# Altium PCB board.PcbDoc
Units mm, origin at the board's own origin, x right, y up, seen from the top; angles counter-clockwise.
Board outline 62 x 44 mm, 2 copper layers (Top Layer, Bottom Layer); 51 components, 62 nets, 217 pads, 78 vias.
Unrouted connection lines stored in the file: 17.
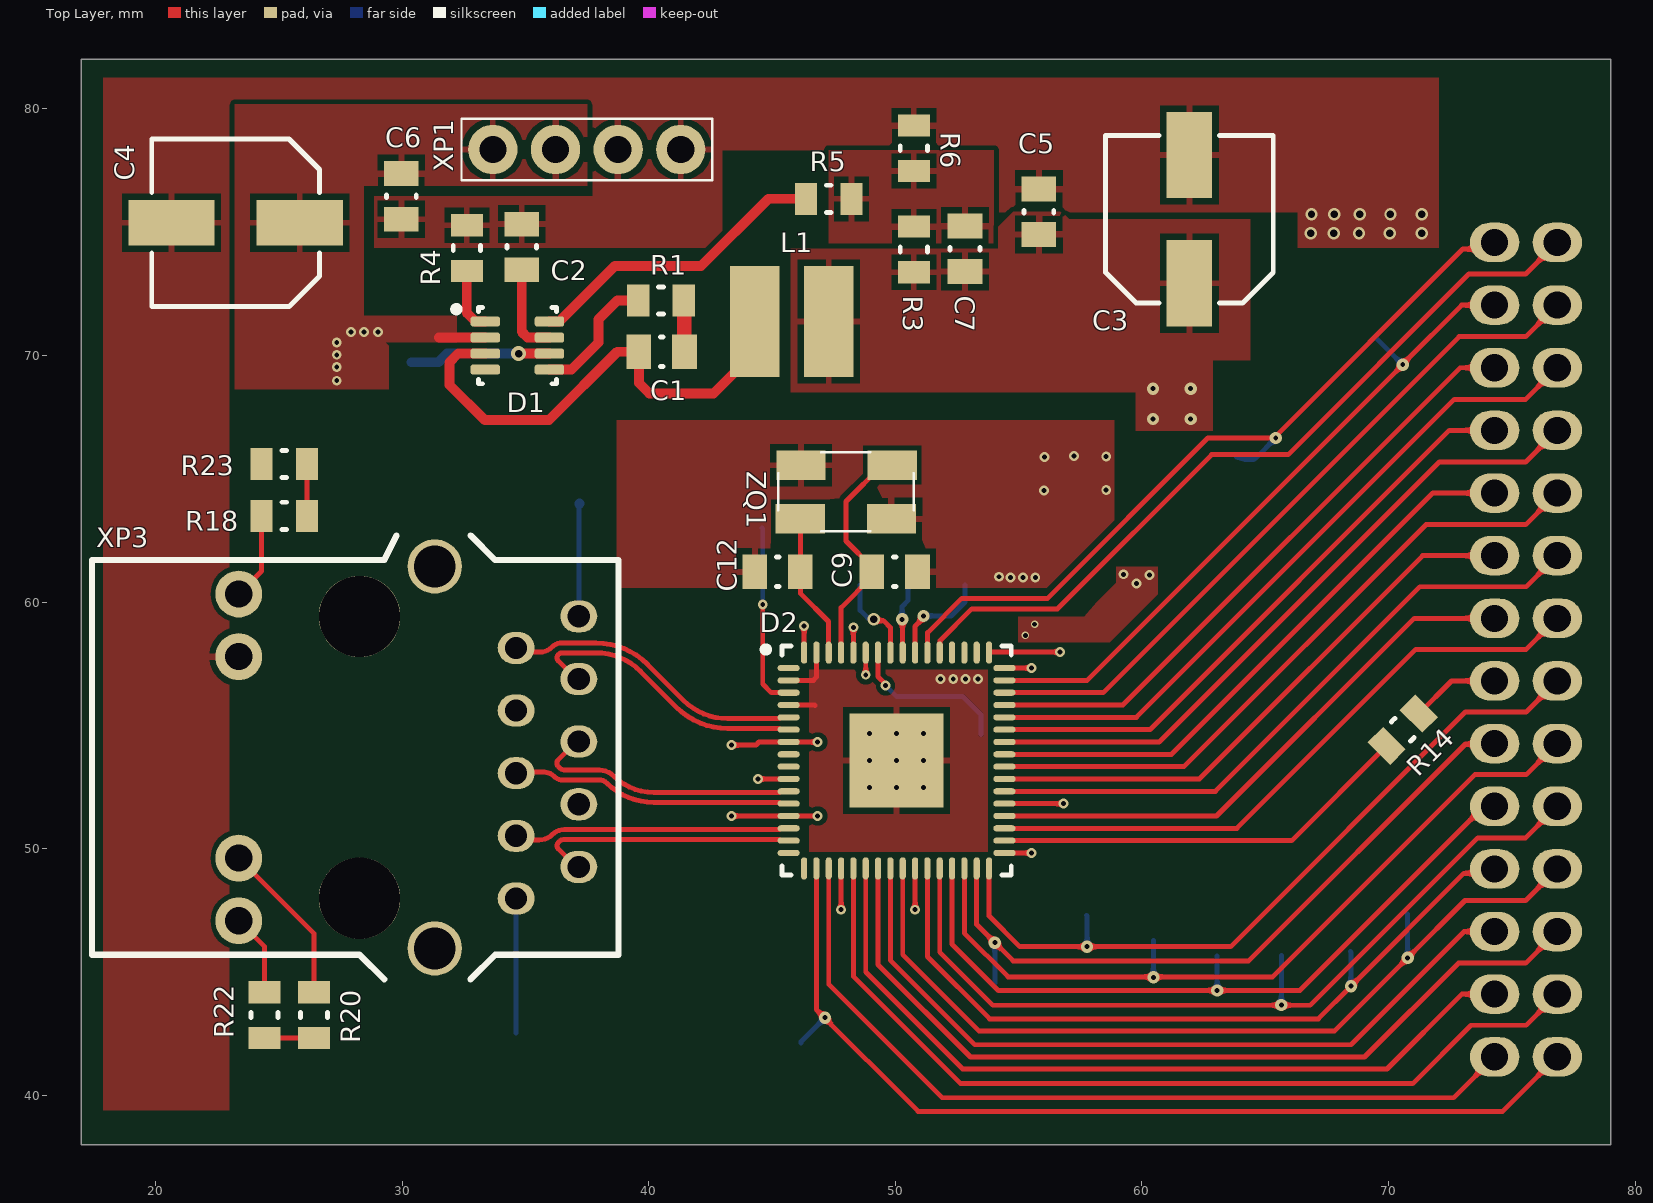
[diagram p0: Top Layer view]
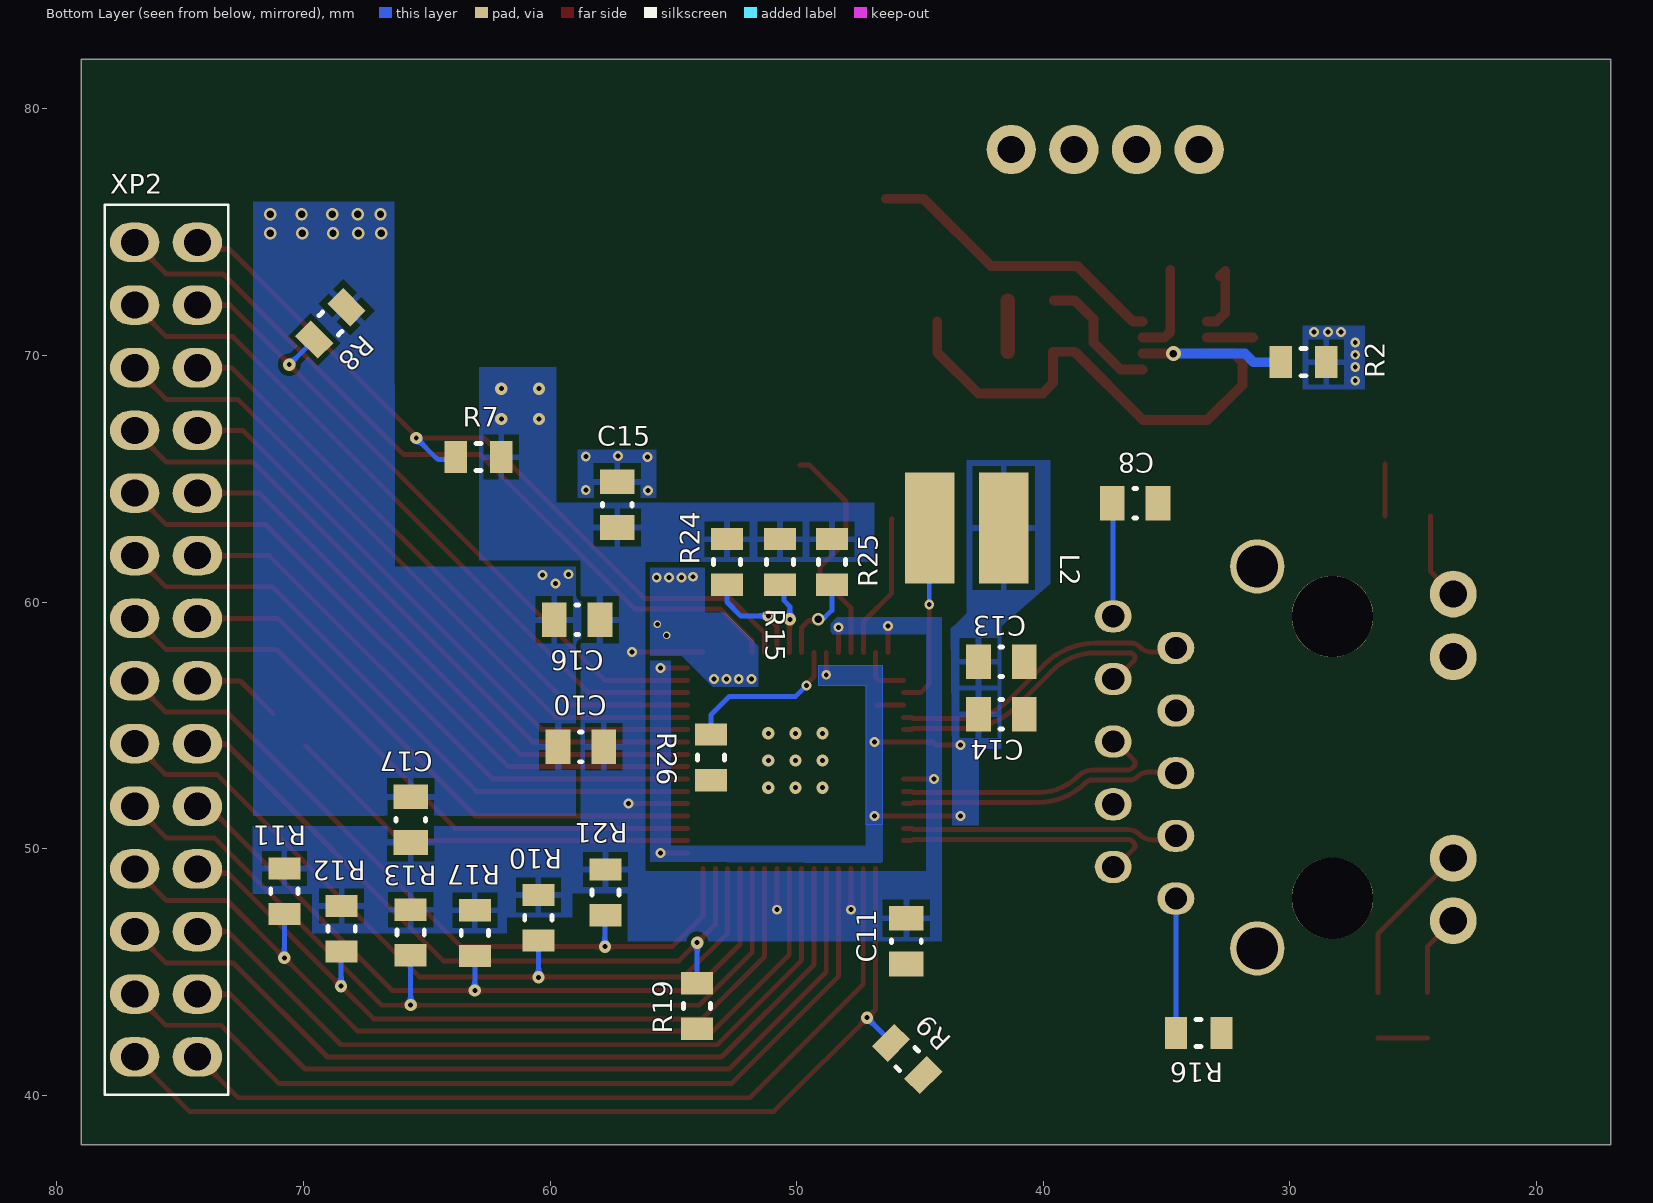
[diagram p1: Bottom Layer view, seen from below]
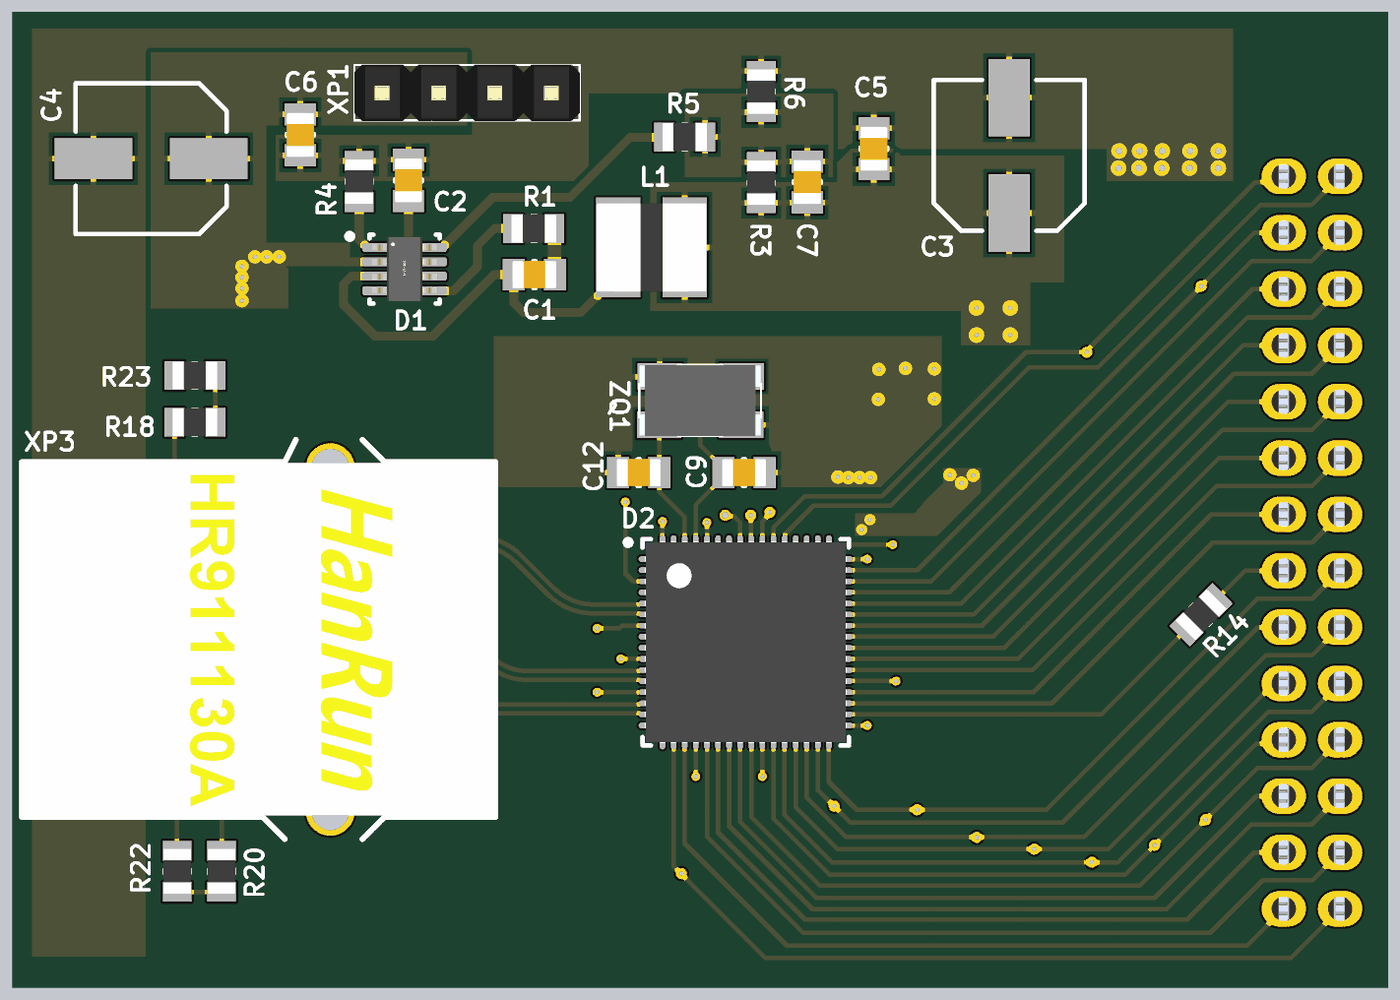
[diagram p2: 3D render of the assembled board from above, using the file's embedded part models]
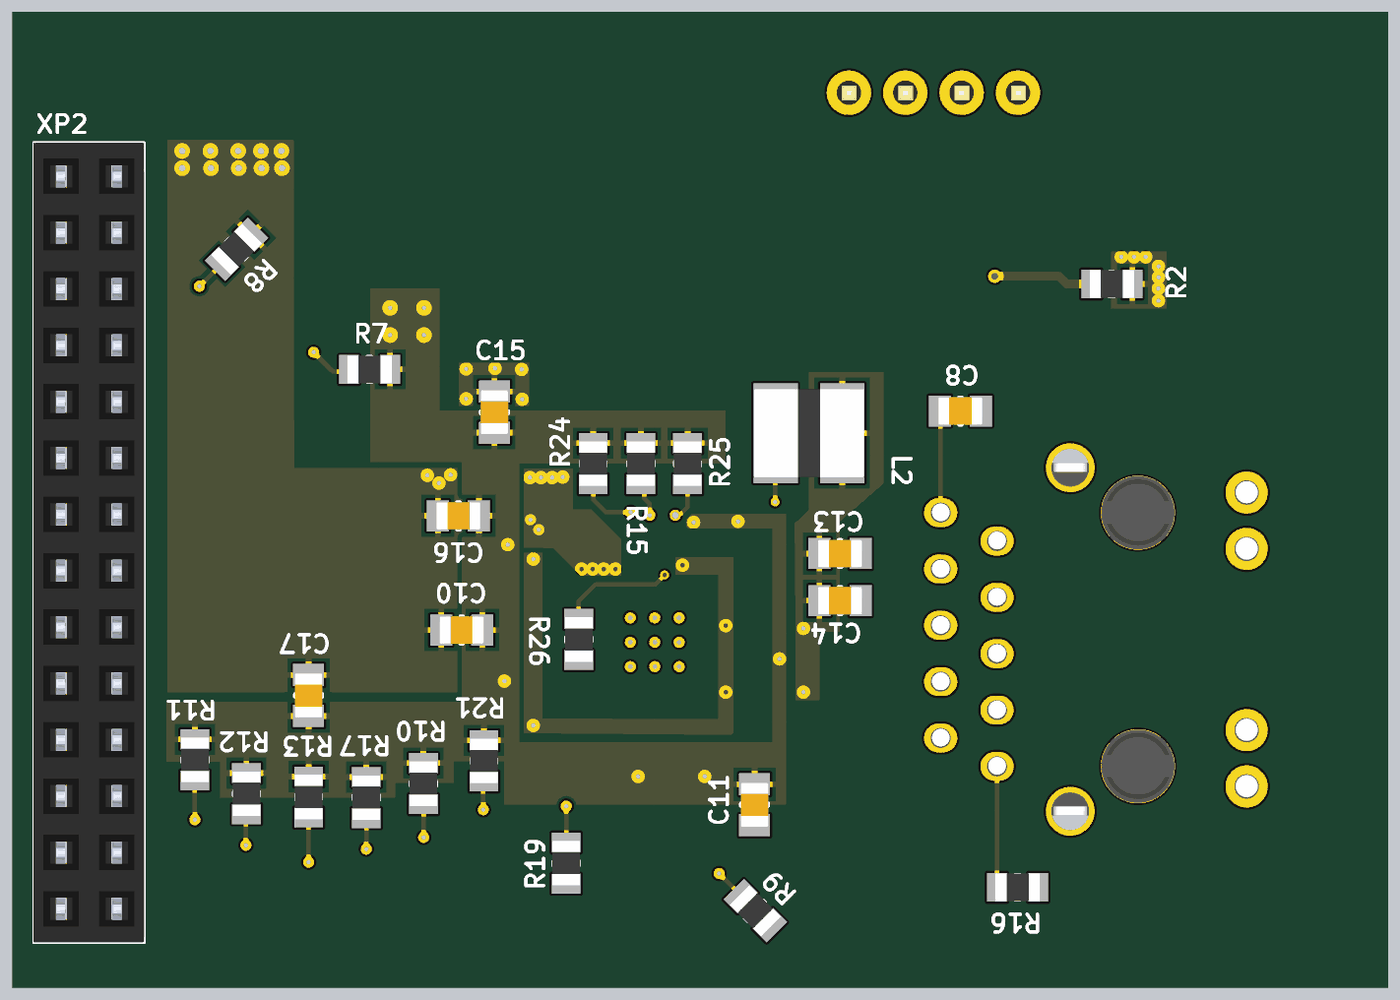
[diagram p3: 3D render of the assembled board from below, using the file's embedded part models]

## Layer stack, top to bottom
Top Solder: solder mask 0.0102, Solder Resist, Dk 3.5
Top Layer: signal copper 0.0356
Dielectric 1: dielectric 0.32, FR-4, Dk 4.8
Bottom Layer: signal copper 0.0356
Bottom Solder: solder mask 0.0102, Solder Resist, Dk 3.5

## Board outline
17,38 79,38 79,82 17,82

## Design rules (kind name [scope] priority, off if disabled: settings)
Clearance [All] p1: gap=0.2 ignorepadtopadclearanceinfootprint=TRUE
DiffPairsRouting [All] p1: maxlimit=0.2 minlimit=0.2 mostfreqgap=0.2 toplayer_minwidth=0.2 toplayer_maxwidth=0.2 toplayer_prefwidth=0.2 bottomlayer_minwidth=0.2 bottomlayer_maxwidth=0.2 bottomlayer_prefwidth=0.2 maxuncoupledlength=12.7
PolygonConnect [All] p1: thpad.connectstyle=Relief thpad.reliefconductorwidth=0.254 thpad.reliefentries=4 thpad.polygonreliefangle="90 Angle" thpad.airgapwidth=0.254 smdpad.connectstyle=Relief smdpad.reliefconductorwidth=0.254 smdpad.reliefentries=4 smdpad.polygonreliefangle="90 Angle" smdpad.airgapwidth=0.254 via.connectstyle=Direct via.reliefconductorwidth=0.254 via.reliefentries=4 via.polygonreliefangle="90 Angle" via.airgapwidth=0.254
RoutingCorners [All] p1: cornerstyle=Round minsetback=2.54 maxsetback=2.54
RoutingVias [All] p1: holewidth=0.5 width=1.1 viastyle="Through Hole" minholewidth=0.2 minwidth=0.3 maxholewidth=6.3 maxwidth=4
SolderMaskExpansion [All] p1: expansion=0.102 istentingtop=FALSE
Width [All] p1: maxlimit=5 minlimit=0.2 preferedwidth=0.2
28 further rules are at their usual default settings.

## Classes and differential pairs
component class power: C1 C2 C3 C4 C5 C6 C7 D1 L1 R1 R2 R3 R4 R5 R6 XP1
component class ethernet: C8 C9 C10 C11 C12 C13 C14 C15 C16 C17 D2 L2 R7 R8 R9 R10 R11 R12 R13 R14 R15 R16 R17 R18 R19 R20 R21 R22 R23 R24 R25 R26 XP2 XP3 ZQ1
differential pair MDI3: +MDI3_P -MDI3_N
differential pair MDI2: +MDI2_P -MDI2_N
differential pair MDI1: +MDI1_P -MDI1_N
differential pair MDI0: +MDI0_P -MDI0_N

## Components (designator, comment, footprint, x,y, rotation, side; value= is the part's Value field where it differs from the comment)
C1 "100nF" "SMD 0805" 40.525,70.15 r180 top
C2 "100nF" "SMD 0805" 34.85,74.4 r270 top
C3 "47uF" "SMD47 ECAP" 61.925,75.525 r90 top
C4 "47uF" "SMD47 ECAP" 23.25,75.375 r180 top
C5 "100nF" "SMD 0805" 55.825,75.825 r270 top
C6 "100nF" "SMD 0805" 29.975,76.45 r270 top
C7 "22pF" "SMD 0805" 52.825,74.325 r270 top
C8 "100nF" "SMD 0805" 36.275,64 r0 bottom
C9 "22pF" "SMD 0805" 49.975,61.225 r0 top
C10 "4.7uF" "SMD 0805" 58.75,54.125 r180 bottom
C11 "100nF" "SMD 0805" 45.55,46.25 r90 bottom
C12 "22pF" "SMD 0805" 45.225,61.225 r180 top
C13 "100nF" "SMD 0805" 41.7,55.45 r0 bottom
C14 "4.7uF" "SMD 0805" 41.7,57.575 r0 bottom
C15 "100nF" "SMD 0805" 57.275,63.95 r270 bottom
C16 "100nF" "SMD 0805" 58.9,59.275 r180 bottom
C17 "100nF" "SMD 0805" 65.652,51.177 r270 bottom
D1 "MP2315" PWR_MP2315 34.675,70.4 r270 top
D2 "RTL8211EG" QFN50P900X900X100_HS-65N 50.05,53.575 r0 top locked
L1 "4.7uH" SP43-4R7M 45.8,71.375 r180 top
L2 "4.7uH" SP43-4R7M 43.1,63 r0 bottom
R1 "20R" RESC0805 40.5,72.225 r180 top
R2 "100K" RESC0805 29.45,69.725 r180 bottom
R3 "100K" RESC0805 50.75,74.3 r270 top
R4 "75K" RESC0805 32.625,74.35 r90 top
R5 "33K" RESC0805 47.3,76.35 r180 top
R6 "33K" RESC0805 50.75,78.4 r270 top
R7 "1.5K" RESC0805 62.9,65.875 r0 bottom
R8 "4.7K" RESC0805 68.904,71.296 r315 bottom
R9 "4.7K" RESC0805 45.521,41.471 r45 bottom
R10 "1.5K" RESC0805 60.475,47.2 r270 bottom
R11 "4.7K" RESC0805 70.775,48.275 r270 bottom
R12 "4.7K" RESC0805 68.45,46.75 r270 bottom
R13 "4.7K" RESC0805 65.65,46.6 r270 bottom
R14 "20R" RESC0805 70.571,54.821 r225 top
R15 "4.7K" RESC0805 50.675,61.625 r270 bottom
R16 "0K" RESC0805 33.7,42.525 r0 bottom
R17 "4.7K" RESC0805 63.05,46.575 r270 bottom
R18 "560R" RESC0805 25.225,63.496 r180 top
R19 "4.7K" RESC0805 54.044,43.619 r90 bottom
R20 "560R" RESC0805 26.425,43.25 r90 top
R21 "1.5K" RESC0805 57.75,48.225 r270 bottom
R22 "4.7K" RESC0805 24.425,43.25 r270 top
R23 "4.7K" RESC0805 25.225,65.6 r0 top
R24 "4.7K" RESC0805 52.825,61.625 r270 bottom
R25 "4.7K" RESC0805 48.571,61.625 r270 bottom
R26 "2.49K" RESC0805 53.475,53.7 r90 bottom
XP1 "PLS-4" PLS-4 37.49,78.35 r0 top
XP2 "PLS-40" PBD-28 74.3,74.58 r270 bottom
XP3 "HR911130A" HR911130A 28.275,53.7 r90 top locked
ZQ1 "YSX531SL" YSX531SL 47.994,64.476 r0 top

## Footprints (in the part's own frame and the unit in brackets; to place one, negate y for a bottom-side part, rotate by r counter-clockwise, add the part's x,y. Pads: shape width x height; smd on the part's side, far side on the other; paste and mask are expansions set on the pad)
HR911130A [mm]
  oval 1.3x1.5 hole 0.9: 1(5.72,-8.89) 2(4.44,-6.35) 3(3.18,-8.89) 4(1.9,-6.35) 5(0.64,-8.89) 6(-0.64,-6.35) 7(-1.9,-8.89) 8(-3.18,-6.35) 9(-4.44,-8.89) 10(-5.72,-6.35)
  round 1.9 hole 1.1: 11(6.625,4.9) 12(4.085,4.9) 13(-4.085,4.9) 14(-6.625,4.9)
  round 2.2 hole 1.7: 15(-7.745,-3.05) 16(7.745,-3.05)
  round 3.3 hole 3.3: ""(-5.715,0) ""(5.715,0)
  silkscreen extent -9,-10.5 9,10.85, body extent -7.93,-10.48 7.96,10.92, height 14
PBD-28 [mm]
  oval 1.6x2 hole 1.1: 1(0,0) 2(0,-2.54) 3(2.54,0) 4(2.54,-2.54) 5(5.08,0) 6(5.08,-2.54) 7(7.62,0) 8(7.62,-2.54) 9(10.16,0) 10(10.16,-2.54) 11(12.7,0) 12(12.7,-2.54) 13(15.24,0) 14(15.24,-2.54) 15(17.78,0) 16(17.78,-2.54) 17(20.32,0) 18(20.32,-2.54) 19(22.86,0) 20(22.86,-2.54) 21(25.4,0) 22(25.4,-2.54) 23(27.94,0) 24(27.94,-2.54) 25(30.48,0) 26(30.48,-2.54) 27(33.02,0) 28(33.02,-2.54)
  silkscreen extent -1.53,-3.75 34.55,1.25, body extent -1.52,-3.75 34.54,1.25, height 8.5
PLS-4 [mm] "Pins 1x4"
  round 2 hole 1.1: 1(-3.81,0) 2(-1.27,0) 3(1.27,0) 4(3.81,0)
  silkscreen extent -5.08,-1.25 5.08,1.25, body extent -5.08,-1.27 5.08,1.27, height 9.2
PWR_MP2315 [mm]
  rrect50% 0.4x1.2 smd: 1(-0.975,-1.3) 2(-0.325,-1.3) 3(0.325,-1.3) 4(0.975,-1.3) 5(0.975,1.3) 6(0.325,1.3) 7(-0.325,1.3) 8(-0.975,1.3)
  silkscreen extent -1.6,-2.6 1.55,1.58, body extent -1.45,-1.48 1.45,1.48, height 1.1
QFN50P900X900X100_HS-65N [mm] "QFN, 64-Leads, Body 9,00x9,00mm, Pitch 0,50mm, Thermal Pad 3,80x3,80mm, IPC Medium Density"
  oval 0.9x0.25 smd: 1(-4.375,3.75) 2(-4.375,3.25) 3(-4.375,2.75) 4(-4.375,2.25) 5(-4.375,1.75) 6(-4.375,1.25) 7(-4.375,0.75) 8(-4.375,0.25) 9(-4.375,-0.25) 10(-4.375,-0.75) 11(-4.375,-1.25) 12(-4.375,-1.75) 13(-4.375,-2.25) 14(-4.375,-2.75) 15(-4.375,-3.25) 16(-4.375,-3.75) 33(4.375,-3.75) 34(4.375,-3.25) 35(4.375,-2.75) 36(4.375,-2.25) 37(4.375,-1.75) 38(4.375,-1.25) 39(4.375,-0.75) 40(4.375,-0.25) 41(4.375,0.25) 42(4.375,0.75) 43(4.375,1.25) 44(4.375,1.75) 45(4.375,2.25) 46(4.375,2.75) 47(4.375,3.25) 48(4.375,3.75)
  oval 0.25x0.9 smd: 17(-3.75,-4.375) 18(-3.25,-4.375) 19(-2.75,-4.375) 20(-2.25,-4.375) 21(-1.75,-4.375) 22(-1.25,-4.375) 23(-0.75,-4.375) 24(-0.25,-4.375) 25(0.25,-4.375) 26(0.75,-4.375) 27(1.25,-4.375) 28(1.75,-4.375) 29(2.25,-4.375) 30(2.75,-4.375) 31(3.25,-4.375) 32(3.75,-4.375) 49(3.75,4.375) 50(3.25,4.375) 51(2.75,4.375) 52(2.25,4.375) 53(1.75,4.375) 54(1.25,4.375) 55(0.75,4.375) 56(0.25,4.375) 57(-0.25,4.375) 58(-0.75,4.375) 59(-1.25,4.375) 60(-1.75,4.375) 61(-2.25,4.375) 62(-2.75,4.375) 63(-3.25,4.375) 64(-3.75,4.375)
  rect 3.8x3.8 smd: 65(0,0)
  silkscreen extent -5.42,-4.65 4.65,4.65, body extent -4.55,-4.55 4.55,4.55, height 1
RESC0805 [mm] "Chip Resistor, 2-Leads, Body 2,00x1,25mm, IPC Medium Density"
  rect 0.9x1.3 smd: 1(-0.925,0) 2(0.925,0)
  silkscreen extent -0.1,-0.55 0.1,0.55, body extent -1,-0.63 1,0.63, height 1.4
"SMD47 ECAP" [mm] "47µF 10V ±20% SMD Electrolytic Capacitor, 105°C, O6.3?5.4mm (JB)"
  rect 3.5x1.85 smd: 1(-2.6,0) 2(2.6,0)
  silkscreen extent -3.4,-3.4 3.4,3.4, body extent -3.4,-3.4 3.4,3.4, height 5.9
"SMD 0805" [mm] "Chip Capacitor, 2-Leads, Body 2,00x1,25mm, IPC Medium Density"
  rect 1x1.4 smd: 1(-0.925,0) 2(0.925,0)
  silkscreen extent -0.05,-0.6 0.05,0.6, body extent -1,-0.63 1,0.63, height 1.4
SP43-4R7M [mm] "Chip Inductor, 2-Leads, Body 4,50x4,00mm, IPC Medium Density"
  rect 2x4.5 smd: 1(-1.5,0) 2(1.5,0)
  body extent -2.5,-2 2.5,2, height 3.2
YSX531SL [mm]
  rect 2x1.2 smd: 1(-1.85,-1.1) 2(1.85,-1.1) 3(1.881,1.074) 4(-1.819,1.074)
  silkscreen extent -2.75,-1.6 2.75,1.6, body extent -2.73,-1.6 2.73,1.6, height 1.15

## Part data
C1 C2 C5 C6 C8 C11 C13 C15 C16 C17: "Конденсатор номиналом 1.5 nF"
C3 C4: "Электролитический конденсатор номиналом 47uF"
C7 C9 C12: "Конденсатор номиналом 22 pF"
C10 C14: "Конденсатор номиналом 4.7 uF"
D1: "Микросхема понижающего преобразователя напряжения со встроенным синхронным выпрямителем на МОП-транзисторах."
L1 L2: library part 4.7u, "Катушка индуктивности 4.7 мкГн"
R1 R14: "Резистор номиналом 20 Ом"
R2 R3: "Резистор номиналом 100 кОм"
R4: "Резистор номиналом 75 кОм"
R5 R6: "Резистор номиналом 33 кОм"
R7 R10 R21: "Резистор номиналом 1.5 кОм"
R8 R9 R11 R12 R13 R15 R17 R19 R22 R23 R24 R25: "Резистор номиналом 4.7 кОм"
R16: "Резистор номиналом 0 Ом"
R18 R20: "Резистор номиналом 560 Ом"
R26: "Резистор номиналом 2.49 кОм"
XP1: library part SMT_POWER, "SMT-разъём для связи платы ПП с периферийными устройствами"
XP2: library part SMT_FPGA, "Служит для подключения разрабатываемой платы"
XP3: library part RJ-45, "Разъём RJ45 с встроенными трансформаторами и индикацией, 10/100Base-T Ethernet (HR911130A)"
ZQ1: "Кварцевый резонатор"

## Via types
v1: diameter 0.4, hole 0.2, Top Layer to Bottom Layer, 39 vias
v2: diameter 0.5, hole 0.2, Top Layer to Bottom Layer, 25 vias
v3: diameter 0.5, hole 0.3, Top Layer to Bottom Layer, 11 vias
v4: diameter 0.3, hole 0.2, Top Layer to Bottom Layer, 2 vias
v5: diameter 0.6, hole 0.3, Top Layer to Bottom Layer, 1 vias

## Nets (pads, with @x,y where several pads share a name; then routed paths per layer and width w, separated by ;. In a path a pad name is that pad's centre, name@x,y a point inside that pad or via, vN(x,y) a via of type N, cw(c..) or ccw(c..) an arc to the next point about the centre after c; other vN are vias at no path point)
+3V3: C3.1 C5.2 C7.2 C10.2 C11.2 C15.2 C16.2 C17.2 D2.10 D2.20 D2.26 D2.37 D2.49 D2.60 D2.64 L1.1 R3.2 R7.1 R10.1 R11.1 R12.1 R13.1 R15.1 R17.1 R21.1 R22.1 R24.1 R25.1 XP3.14 | length 15.3
  Top Layer w0.2: XP3.14 24.425,46.025 R22.1 ; v1(44.425,52.825) D2.10 ; D2.64 v1(46.3,59.025) ; v1(47.8,47.525) D2.20 ; D2.60 v1(48.3,58.975) ; v1(50.8,47.525) D2.26 ; D2.49 53.8,57.952 53.823,57.975 v1(56.675,57.975) ; D2.37 v1(56.825,51.825)
  other v2: 60.45,67.425 61.975,67.425 60.45,68.65 61.975,68.65
CKXTAL1: C9.1 D2.61 ZQ1.3 | length 9.6
  Top Layer w0.2: D2.61 47.8,59.775 49.05,61.025 C9.1 49.05,61.425 48,62.475 48,64.075 49.475,65.55 ZQ1.3
CKXTAL2: C12.1 D2.62 ZQ1.1 | length 5.9
  Top Layer w0.2: ZQ1.1 46.15,63.37 C12.1 46.158,61.217 46.158,60.342 47.29,59.21 47.29,57.96 D2.62
COL: D2.31 R19.2 XP2.17 | length 29.2
  Top Layer w0.2: D2.31 53.3,46.925 54.775,45.45 64.325,45.45 73.117,54.242 74.282,54.242 XP2.17
  Bottom Layer w0.2: v2(54.038,46.188) 54.038,44.551 R19.2
CRS: D2.32 R21.2 XP2.16 | length 31.2
  Top Layer w0.2: D2.32 53.8,47.275 55.05,46.025 v2(57.775,46.025) 63.6,46.025 73.115,55.54 75.58,55.54 XP2.16
  Bottom Layer w0.2: R21.2 57.775,47.275 v2(57.775,46.025)
GND: C2.1 C3.2 C4.2 C5.1 C6.2 C8.1 C9.2 C10.1 C11.1 C12.2 C13.1 C14.1 C15.1 C16.1 C17.1 D1.4 D2.2 D2.4 D2.63 D2.65 R4.2 R6.1 R8.1 R9.1 R16.1 R19.1 R23.1 R26.1 XP1.3 XP1.4 XP3.12 XP3.15 XP3.16 ZQ1.2 ZQ1.4 | length 3.3
  Top Layer w0.2: D2.4 46.725,55.825 46.75,55.8 ; D2.2 46.675,56.825 46.8,56.95 D2.63
  other v1: 51.825,56.875 52.35,56.875 52.85,56.875 53.35,56.875 59.775,60.75 54.675,61 55.175,61 55.675,61 54.2,61.025 59.25,61.125 60.3,61.1 56.025,64.525 58.55,64.55 56.05,65.875 58.55,65.9 57.25,65.925
  other v2: 48.95,52.475 50.05,52.475 51.15,52.475 48.95,53.575 50.05,53.575 51.15,53.575 48.95,54.675 50.05,54.675 51.15,54.675
  other v3: 66.85,74.95 67.775,74.95 68.8,74.95 70.05,74.95 71.35,74.95 66.875,75.725 67.8,75.725 68.825,75.725 70.075,75.725 71.35,75.725
  other v4: 55.275,58.65 55.65,59.1
GTX_CLK: R14.1 XP2.15 | length 3.6
  Top Layer w0.2: R14.1 72.55,56.8 XP2.15
LED0: D2.50 R20.1 R22.2 | length 2
  Top Layer w0.2: R22.2 R20.1
LED1: D2.51 R18.1 R23.2 | length 2.1
  Top Layer w0.2: R18.1 R23.2
MDC: D2.53 XP2.2 | length 32.2
  Top Layer w0.2: D2.53 51.81,57.96 51.81,58.435 53.1,59.725 56.575,59.725 62.825,65.975 65.925,65.975 73.25,73.3 75.56,73.3 XP2.2
MDI0_N: D2.6 XP3.3 | length 11.8
  Top Layer w0.2: XP3.3 cw(c37.165,57.121) 36.994,56.951 36.346,57.599 cw(c36.488,57.74) 36.288,57.74 cw(c36.488,57.74) 36.346,57.881 cw(c36.488,57.74) 36.488,57.94 37.867,57.94 cw(c37.867,55.4) 39.663,57.196 41.124,55.735 ccw(c43.201,57.811) 43.201,54.875 45.251,54.875 cw(c45.251,54.79) 45.311,54.85 ccw(c45.372,54.91) 45.372,54.825 D2.6
MDI0_P: D2.5 XP3.2 | length 12.2
  Top Layer w0.2: XP3.2 ccw(c35.03,58.545) 35.03,57.972 35.599,57.972 ccw(c35.599,58.631) 36.065,58.165 cw(c36.486,57.744) 36.486,58.34 37.872,58.34 cw(c37.872,55.411) 39.943,57.482 41.406,56.019 ccw(c43.202,57.815) 43.202,55.275 45.251,55.275 ccw(c45.251,55.36) 45.311,55.3 cw(c45.372,55.24) 45.372,55.325 D2.5
MDI1_N: D2.9 XP3.7
MDI1_P: D2.8 XP3.4
MDI2_N: D2.12 XP3.6 | length 11.4
  Top Layer w0.2: XP3.6 cw(c34.724,52.961) 34.724,53.101 35.767,53.101 cw(c35.767,52.56) 36.15,52.942 ccw(c36.533,53.325) 36.533,52.784 38.011,52.784 cw(c38.011,52.386) 38.292,52.667 ccw(c40.205,54.58) 40.205,51.875 45.251,51.875 cw(c45.251,51.79) 45.311,51.85 ccw(c45.372,51.91) 45.372,51.825 D2.12
MDI2_P: D2.11 XP3.5 | length 11.1
  Top Layer w0.2: 36.333,53.325 36.374,53.284 ccw(c36.616,53.525) 36.616,53.184 38.013,53.184 cw(c38.013,52.392) 38.573,52.952 38.575,52.95 ccw(c40.205,54.58) 40.205,52.275 45.251,52.275 ccw(c45.251,52.36) 45.311,52.3 cw(c45.372,52.24) 45.372,52.325 D2.11 ; 36.333,53.325 cw(c36.474,53.467) 36.274,53.467 cw(c36.474,53.467) 36.333,53.608 36.994,54.269 cw(c37.165,54.099) XP3.5
MDI3_N: D2.15 XP3.9 | length 10.8
  Top Layer w0.2: XP3.9 cw(c37.165,49.501) 36.994,49.331 36.346,49.979 cw(c36.488,50.12) 36.288,50.12 cw(c36.488,50.12) 36.346,50.261 36.374,50.289 cw(c36.582,50.081) 36.582,50.375 45.251,50.375 cw(c45.251,50.29) 45.311,50.35 ccw(c45.372,50.41) 45.372,50.325 D2.15
MDI3_P: D2.14 XP3.8 | length 11.2
  Top Layer w0.2: XP3.8 ccw(c35.03,50.925) 35.03,50.352 35.56,50.352 ccw(c35.56,51.106) 36.092,50.573 cw(c36.58,50.085) 36.58,50.775 45.251,50.775 ccw(c45.251,50.86) 45.311,50.8 cw(c45.372,50.74) 45.372,50.825 D2.14
MDIO: D2.54 R7.2 XP2.1 | length 32.4
  Top Layer w0.2: D2.54 51.31,57.96 51.31,58.76 52.7,60.15 56.175,60.15 62.675,66.65 v2(65.425,66.65) 65.425,66.724 73.013,74.312 74.032,74.312 XP2.1
  Bottom Layer w0.2: R7.2 64.175,65.775 64.467,65.775 ccw(c64.467,65.975) 64.608,65.833 v2(65.425,66.65)
NetC1_1: C1.1 R1.1 | length 2.1
  Top Layer w0.4: R1.1 R1.1@41.438,72.212 ; C1.1@41.438,70.163 C1.1
  Top Layer w0.6: C1.1@41.438,70.163 R1.1@41.438,72.212
NetC1_2: C1.2 D1.3 L1.2 | length 20
  Top Layer w0.4: D1.3 32.275,70.075 31.925,69.725 31.925,68.8 33.35,67.375 35.95,67.375 38.725,70.15 C1.2 39.6,68.875 40.025,68.45 42.625,68.45 44.3,70.125 L1.2
NetC2_2: C2.2 D1.7 | length 3.7
  Top Layer w0.4: C2.2 34.85,70.959 35.084,70.725 D1.7
NetC7_1: C7.1 R3.1 R5.1 R6.2
NetC8_2: C8.2 XP3.1 | length 4.6
  Bottom Layer w0.2: XP3.1@37.182,59.438 C8.2@37.182,63.982
  Bottom Layer w0.4: XP3.1 XP3.1@37.182,59.438 ; C8.2@37.182,63.982 C8.2
NetD1_1: D1.1 R4.1 | length 2.9
  Top Layer w0.4: R4.1@32.841,73.209 R4.1 32.625,71.725 32.975,71.375 D1.1
NetD1_5: D1.5 R1.2 | length 5.3
  Top Layer w0.4: D1.5 36.875,69.425 37.967,70.517 37.967,71.467 38.725,72.225 R1.2
NetD1_6: D1.6 R2.1 | length 5.7
  Top Layer w0.4: v5(34.725,70.075) D1.6
  Bottom Layer w0.4: R2.1 31.475,69.725 31.825,70.075 v5(34.725,70.075)
NetD1_8: D1.8 R5.2 | length 12.5
  Top Layer w0.4: D1.8 36.375,71.375 38.625,73.625 42.125,73.625 44.85,76.35 R5.2
NetD2_3: D2.3 L2.2 | length 7.5
  Top Layer w0.2: v1(44.625,59.9) 44.625,56.675 44.975,56.325 D2.3
  Bottom Layer w0.2: L2.2 44.625,62.975 v1(44.625,59.9)
NetD2_34: D2.34 R14.2 | length 17.1
  Top Layer w0.2: D2.34 66.075,50.325 R14.2
NetD2_55: D2.55 R24.2 | length 4.2
  Top Layer w0.2: D2.55 50.8,59.015 51.139,59.354 v2(51.139,59.436)
  Bottom Layer w0.2: v2(51.139,59.436) 52.261,59.436 52.825,60 R24.2
NetD2_56: D2.56 R15.2 | length 2.9
  Top Layer w0.2: v2(50.275,59.3) 50.29,59.285 50.29,57.96 D2.56
  Bottom Layer w0.2: v2(50.275,59.3) 50.275,59.82 50.522,60.067 50.522,60.547 R15.2
NetD2_57: D2.57 R25.2 | length 3.6
  Top Layer w0.2: v3(49.125,59.3) 49.182,59.243 49.526,59.243 49.8,58.969 D2.57
  Bottom Layer w0.2: R25.2 48.571,59.665 48.878,59.357 49.068,59.357 v3(49.125,59.3)
NetD2_58: D2.58 R26.2 | length 6.6
  Top Layer w0.2: D2.58 49.3,56.97 49.606,56.664 v1(49.606,56.61)
  Bottom Layer w0.2: v1(49.606,56.61) 50.041,56.175 52.725,56.175 53.475,55.425 R26.2
NetR16_2: R16.2 XP3.10 | length 5.5
  Bottom Layer w0.2: R16.2 XP3.10
NetR18_2: R18.2 XP3.11 | length 3.6
  Top Layer w0.2: XP3.11 24.3,61.25 R18.2
NetR20_2: R20.2 XP3.13 | length 6.7
  Top Layer w0.2: XP3.13 26.425,46.565 R20.2
PHYRSTB: D2.38 XP2.12 | length 26.4
  Top Layer w0.2: D2.38 62.975,52.325 71.27,60.62 75.58,60.62 XP2.12
RXCLK: D2.24 XP2.23 | length 31.5
  Top Layer w0.2: D2.24 49.8,45.475 53.225,42.05 68.475,42.05 73.065,46.64 XP2.23
RXD0: D2.19 XP2.27 | length 34.3
  Top Layer w0.2: D2.19 47.3,44.5 51.9,39.9 72.64,39.9 XP2.27
RXD1: D2.21 XP2.26 | length 36.2
  Top Layer w0.2: D2.21 48.3,44.825 52.65,40.475 70.975,40.475 73.34,42.84 75.58,42.84 XP2.26
RXD2: D2.22 XP2.25 | length 32.6
  Top Layer w0.2: D2.22 48.8,45 52.731,41.069 69.934,41.069 72.966,44.1 XP2.25
RXD3: D2.23 XP2.24 | length 35.1
  Top Layer w0.2: D2.23 49.3,45.3 53.05,41.55 69.025,41.55 72.835,45.36 75.56,45.36 XP2.24
RXD4: D2.25 R11.2 XP2.22 | length 35.8
  Top Layer w0.2: D2.25 50.3,45.7 53.4,42.6 67.8,42.6 v2(70.775,45.575) 73.1,47.9 75.56,47.9 XP2.22
  Bottom Layer w0.2: v2(70.775,45.575) R11.2
RXD5: D2.27 R12.2 XP2.21 | length 31.5
  Top Layer w0.2: D2.27 51.3,45.625 53.825,43.1 67.15,43.1 v2(68.475,44.425) 73.05,49 74.12,49 XP2.21
  Bottom Layer w0.2: R12.2 68.475,45.8 v2(68.475,44.425)
RXD6: D2.28 R13.2 XP2.20 | length 34.7
  Top Layer w0.2: D2.28 51.8,45.8 53.95,43.65 66.825,43.65 73.615,50.44 75.56,50.44 XP2.20
  Bottom Layer w0.2: v2(65.65,43.66) R13.2
RXD7: D2.29 R17.2 XP2.19 | length 30.3
  Top Layer w0.2: D2.29 52.3,46.125 54.175,44.25 v2(63.05,44.25) 66.4,44.25 73.87,51.72 XP2.19
  Bottom Layer w0.2: v2(63.05,44.25) R17.2
RXDV: D2.18 R9.2 XP2.28 | length 39.9
  Top Layer w0.2: D2.18 46.8,43.475 50.925,39.35 74.63,39.35 XP2.28
  Bottom Layer w0.2: R9.2 46.175,42.175 v2(47.15,43.15) cw(c47.029,43.15) v2@47.115,43.065
RXER: D2.30 R10.2 XP2.18 | length 32.8
  Top Layer w0.2: D2.30 52.8,46.575 54.575,44.8 60.466,44.8 65.3,44.8 73.5,53 75.58,53 XP2.18
  Bottom Layer w0.2: v2(60.466,44.78) 60.466,46.266 R10.2
TXCLK: D2.42 XP2.8 | length 27.6
  Top Layer w0.2: D2.42 60.7,54.325 72.055,65.68 75.56,65.68 XP2.8
TXD0: D2.36 XP2.13 | length 23.2
  Top Layer w0.2: D2.36 63.025,51.325 71.04,59.34 XP2.13
TXD1: D2.39 XP2.11 | length 23.6
  Top Layer w0.2: D2.39 62.325,52.825 71.38,61.88 XP2.11
TXD2: D2.40 XP2.10 | length 27
  Top Layer w0.2: D2.40 61.7,53.325 71.515,63.14 75.56,63.14 XP2.10
TXD3: D2.41 XP2.9 | length 24.3
  Top Layer w0.2: D2.41 61.2,53.825 71.795,64.42 XP2.9
TXD4: D2.43 XP2.7 | length 24.9
  Top Layer w0.2: D2.43 60.325,54.825 72.46,66.96 XP2.7
TXD5: D2.44 XP2.6 | length 28.3
  Top Layer w0.2: D2.44 59.775,55.325 72.67,68.22 75.56,68.22 XP2.6
TXD6: D2.45 XP2.5 | length 25.5
  Top Layer w0.2: D2.45 59.225,55.825 72.9,69.5 XP2.5
TXD7: D2.46 XP2.4 | length 28.9
  Top Layer w0.2: D2.46 58.425,56.325 72.86,70.76 75.56,70.76 XP2.4
TXEN: D2.35 XP2.14 | length 25.9
  Top Layer w0.2: D2.35 63.85,50.825 71.105,58.08 75.58,58.08 XP2.14
TXER: D2.47 R8.2 XP2.3 | length 27.6
  Top Layer w0.2: D2.47 57.775,56.825 v2(70.575,69.625) 70.575,69.65 72.965,72.04 XP2.3
  Bottom Layer w0.2: R8.2 v2(70.575,69.625)
Vdd10: C13.2 C14.2 D2.7 D2.13 D2.33 D2.48 D2.59 L2.1 | length 10.2
  Top Layer w0.2: v1(43.35,51.325) D2.13 v1(46.85,51.325) ; v1(43.35,54.2) 44.35,54.2 44.475,54.325 v1(46.85,54.325) ; v1(48.8,57.05) D2.59 ; D2.33 v1(55.525,49.825) ; D2.48 v1(55.525,57.325)
VIN_5V: C4.1 C6.1 D1.2 R2.2 XP1.1 XP1.2 | length 1.9
  Top Layer w0.2: 31.45,70.775 31.5,70.725
  Top Layer w0.4: 31.5,70.725 D1.2
  other v1: 27.35,68.975 27.35,69.525 27.35,70.025 27.35,70.525 27.925,70.95 28.45,70.95 29.025,70.95
pads on no net: D2.1 D2.16 D2.17 D2.52 XP3.

## Polygon pours and split planes (outlines as drawn)
GND on Top Layer "GND_L01_P041" (solid, remove dead copper, pour order 41): 54.975,59.4 54.975,58.375 58.7,58.375 60.65,60.325 60.65,61.425 58.95,61.425 58.95,60.775 58.175,60 57.669,59.4
GND on Top Layer "GND_L01_P037" (solid, remove dead copper, pour order 37): 38.7,67.375 38.7,60.575 58.875,60.575 58.875,67.375
GND on Top Layer "Top Layer-GND" (solid, remove dead copper, pour order 32): 66.325,74.375 72.025,74.375 72.025,81.25 17.875,81.25 17.875,39.4 23,39.4 23,80.175 37.725,80.175 37.725,76.45 28.875,76.45 28.875,74.375 42.975,74.375 42.975,78.35 43,78.325 54,78.325 54,75.8 66.325,75.8
GND on Top Layer "GND_L01_P026" (solid, remove dead copper, pour order 26): 46.5,57.25 53.75,57.25 53.75,49.875 46.5,49.875
+3V3 on Top Layer "+3V3_L01_P005" (solid, remove dead copper, pour order 5): 45.75,74.325 45.75,68.5 59.75,68.5 59.75,66.95 62.875,66.95 62.875,69.8 64.4,69.8 64.4,75.525 57.05,75.525 56.75,75.825 54.775,75.825 54.175,75.225 54.175,74.325
NetC7_1 on Top Layer "NETC7_1_L01_P006" (solid, remove dead copper, pour order 6): 47.3,78.325 47.3,74.55 54,74.55 54,78.325
VIN_5V on Top Layer "Top Layer-VIN_5V" (solid, remove dead copper, pour order 2): 23.225,68.625 29.45,68.625 29.45,70.4 29.325,70.525 32.225,70.525 32.225,71.6 28.451,71.6 28.449,76.875 37.5,76.875 37.5,80.175 23.225,80.175
Vdd10 on Bottom Layer "Bottom Layer-Vdd10" (solid, remove dead copper, pour order 25): 42.625,50.95 43.7,50.95 43.699,50.951 43.699,53.675 43.75,59.025 43.625,59.025 43.1,59.55 43.1,65.75 39.725,65.75 39.725,60.739 41.7,59.025 41.7,54.05 42.625,54.05
GND on Bottom Layer "GND_L02_P042" (solid, remove dead copper, pour order 42): 55.7,66.175 55.7,64.025 58.875,64.025 58.875,66.175
GND on Bottom Layer (solid, remove dead copper, pour order 40): 51.55,56.575 53.4,56.575 54.65,57.825 55.95,57.825 55.95,59.125 55.975,59.15 55.975,61.4 53.725,61.4 53.725,59.575 52.925,59.575 51.55,58.2
Vdd10 on Bottom Layer (solid, pour order 36): 46.5,49.4 55.95,49.475 55.95,57.625 55.1,57.625 55.1,50.137 47.2,50.113 47.2,56.625 49.125,56.625 49.125,57.425 46.5,57.425 46.5,51
Vdd10 on Bottom Layer "Bottom Layer-Vdd10 1" (solid, pour order 20): 49.125,57.425 49.125,56.625 47.2,56.625 47.2,51 46.5,51 46.5,57.425
VIN_5V on Bottom Layer "VIN_5V_L02_P034" (solid, remove dead copper, pour order 34): 26.975,68.625 29.475,68.625 29.475,71.2 26.975,71.2
GND on Bottom Layer "GND_L02_P033" (solid, remove dead copper, pour order 33): 66.326,76.225 72.025,76.225 72.025,51.325 58.725,51.325 58.725,61.425 66.3,61.425
+3V3 on Bottom Layer "Bottom Layer-+3V3" (solid, remove dead copper, pour order 17): 59.1,47.225 61.75,47.225 61.75,46.575 69.65,46.575 69.65,48.175 72.05,48.175 72.05,50.9 58.75,50.9 58.75,61.7 62.875,61.7 62.875,69.525 59.75,69.525 59.75,64.025 46.85,64.025 46.85,61.625 56.15,61.625 56.15,49.075 44.75,49.075 44.75,58.7 48.625,58.7 48.625,59.125 48.375,59.375 44.125,59.375 44.125,46.25 56.85,46.25 56.85,48.2 59.1,48.2

## Silkscreen, mask and mechanical layers (free items; w line width, h text height)
Border:
  the board outline again, w0.3